# EAGLE board Anoloctive Eurorack Panel (EAGLE 9.6.2)
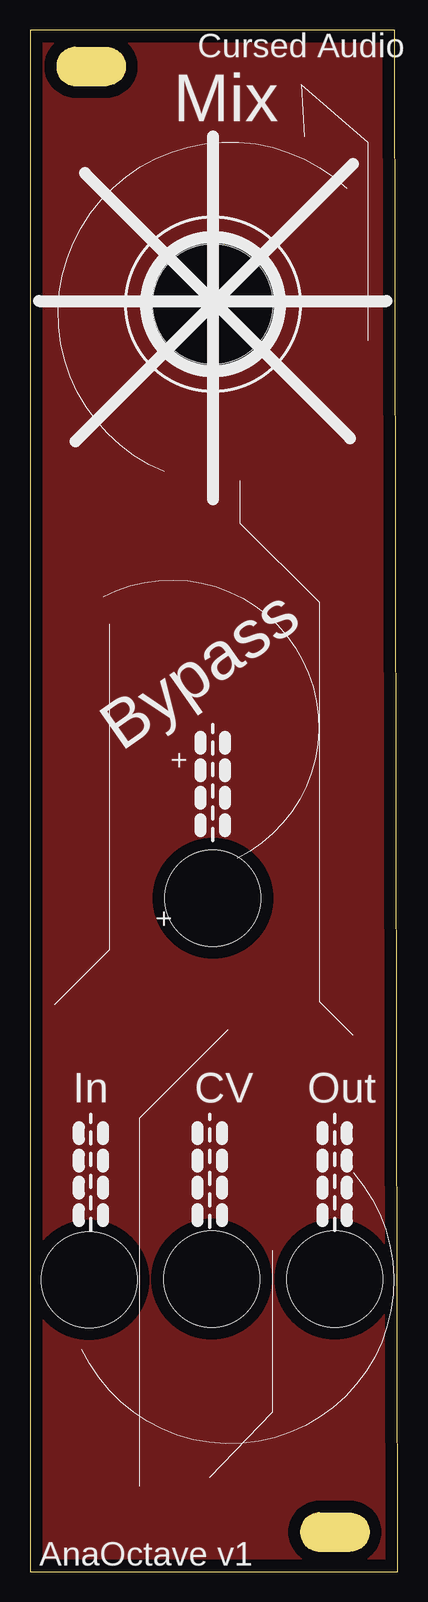
[diagram p0: board, top side]

Size 30.66 x 128.51 mm. Coordinates in mm from the lower left corner, seen from the top.
Outline: 0,0 30.66,0 30.4,128.51 0,128.51 0,0
Copper layers (1*16): Top 0.035mm / dielectric 1.5mm / Bottom 0.035mm
Design rules "default": minimum track width 6mil, minimum drill 0.35mm, track to track 6mil, track to pad 6mil, pad to pad 6mil, via to via 6mil, smd to smd 6mil, copper to edge 40mil, drill to drill 6mil, minimum pad ring 10mil, minimum via ring 8mil, stop-mask expansion 4mil, vias tented up to drill 0mil, thermal gap 10mil
Net classes: 0 default: width 0.457 mm
Holes 8 mm at 15.24,56.13 4.93,24.33 15.14,24.38 25.4,24.38
Holes 10 mm at 15.24,105.66

## Placement (x,y rotation side)
U$2  [SLOT_HOLE]  5.08,125.48 0 top
U$3  [SLOT_HOLE]  25.4,3.3 0 top

## Library data of the parts
U$2 U$3 = MusicThingModular

## Tracks (layer width: path | path; a pad name or v marks a point on that pad's centre or on a via)
GND
  pour Top: 0,128.76 31,128.76 31,-0.24 0,-0.24

## Text on the board
tPlace: Cursed Audio | Mix | Bypass | + | + | In | CV | Out | AnaOctave v1